# Altium PCB ROTARY_SW.PcbDoc
Units mil, origin at the board's own origin, x right, y up, seen from the top; angles counter-clockwise.
Board outline 675 x 750 mil, 2 copper layers (Top Layer, Bottom Layer); 8 components, 6 nets, 25 pads, 0 vias.
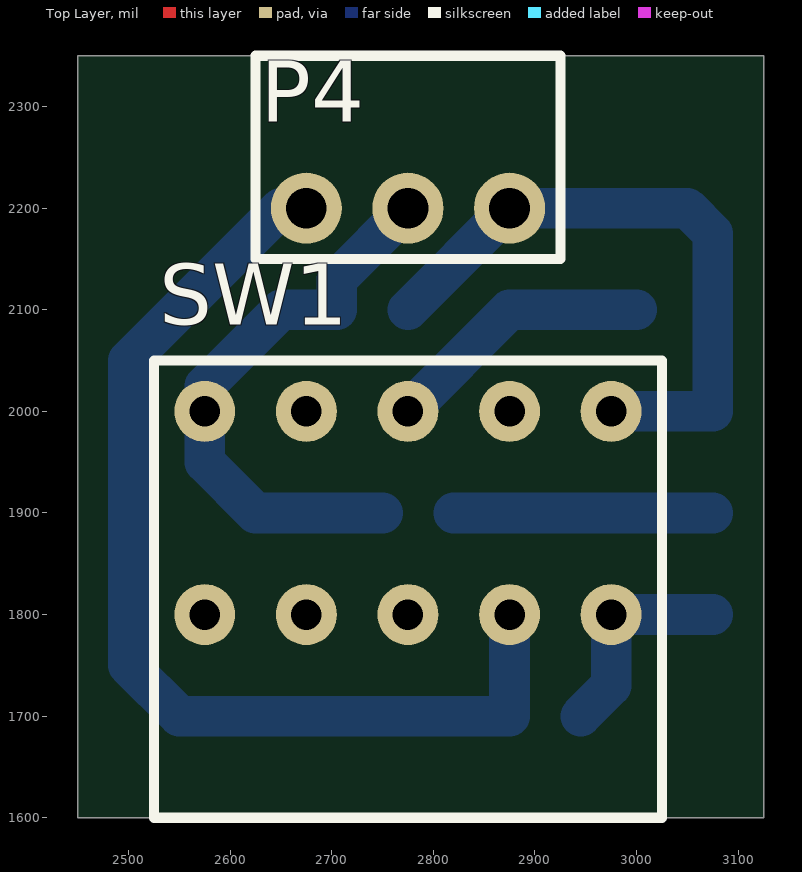
[diagram p0: Top Layer view]
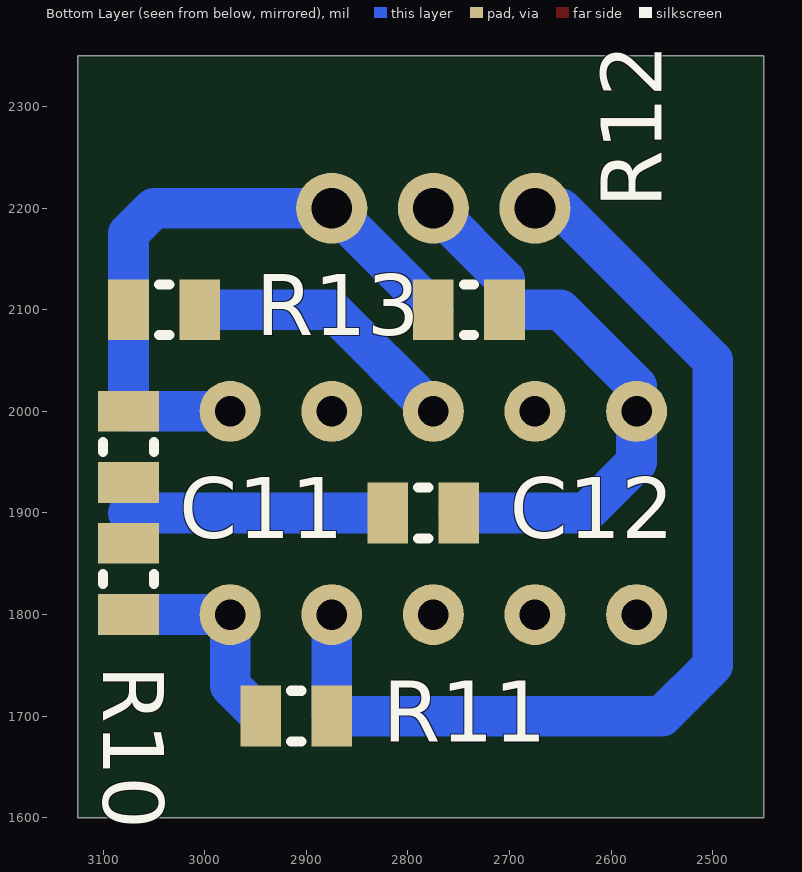
[diagram p1: Bottom Layer view, seen from below]
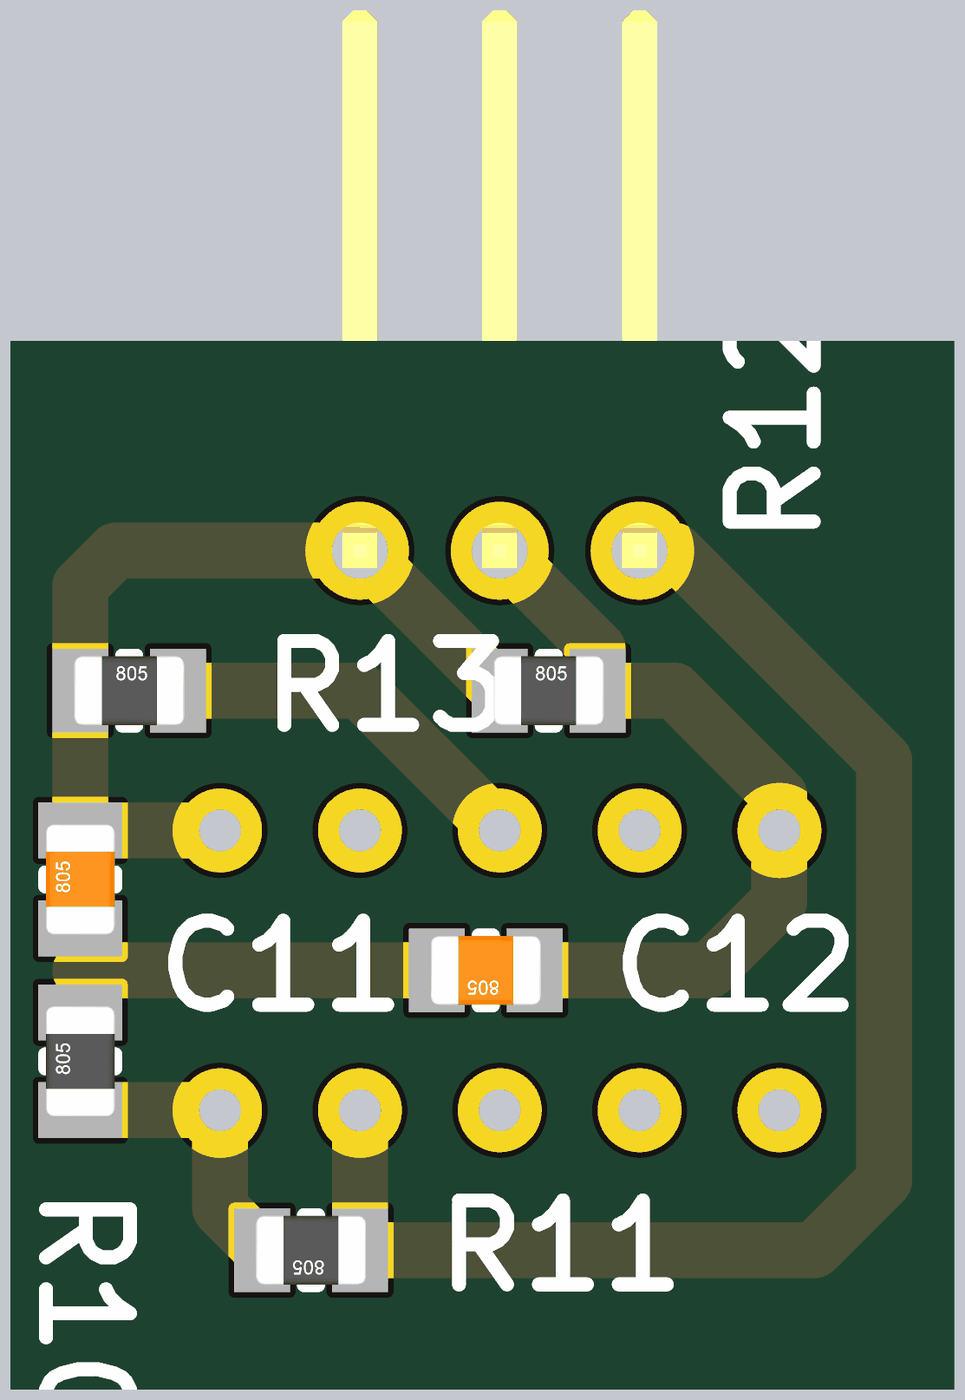
[diagram p2: 3D render of the assembled board from below, using the file's embedded part models]

## Layer stack, top to bottom
Top Solder: solder mask 0.4, Solder Resist, Dk 3.5
Top Layer: signal copper 1.4
Dielectric 1: dielectric 12.6, FR-4, Dk 4.8
Bottom Layer: signal copper 1.4
Bottom Solder: solder mask 0.4, Solder Resist, Dk 3.5

## Board outline
2450,1600 2450,2350 3125,2350 3125,1600

## Design rules (kind name [scope] priority, off if disabled: settings)
Clearance [All] p1: gap=10
PolygonConnect [All] p1: connectstyle=Relief reliefconductorwidth=10 reliefentries=4 polygonreliefangle="90 Angle" airgapwidth=10
RoomDefinition ROTARY_SW [InComponentClass('ROTARY_SW')] p1 off: confinementstyle=ConfineIn formatcopy=TRUE lockcomponents=FALSE outline 2450,1600 3125,1600 3125,2350 2450,2350
RoutingVias [All] p1: holewidth=28 width=50 viastyle="Through Hole" minholewidth=28 minwidth=50 maxholewidth=28 maxwidth=50
SilkToBoardRegionClearance [All] p1 off:
SolderMaskExpansion [All] p1: expansion=4
Width [All] p1: maxlimit=40 minlimit=40 preferedwidth=40
28 further rules are at their usual default settings.

## Components (designator, comment, footprint, x,y, rotation, side; value= is the part's Value field where it differs from the comment)
C11 "Capacitor" 0805_Capacitor 3075,2005 r180 bottom
C12 "Capacitor" 0805_Capacitor 2825,1900 r90 bottom
P4 "SIL-CONN-3" SIL-CONN-3-R1 2875,2200 r270 top
R10 "Resistor" 0805_Resistor 3075,1875 r180 bottom
R11 "Resistor" 0805_Resistor 2950,1700 r90 bottom
R12 "Resistor" 0805_Resistor 2700,2100 r270 bottom
R13 "Resistor" 0805_Resistor 3000,2100 r270 bottom
SW1 "SRBM131400" SRBM131400 2575,1800 r90 top

## Footprints (in the part's own frame and the unit in brackets; to place one, negate y for a bottom-side part, rotate by r counter-clockwise, add the part's x,y. Pads: shape width x height; smd on the part's side, far side on the other; paste and mask are expansions set on the pad)
0805_Capacitor [mil]
  rect 60x40 smd: 1(0,-5) 2(0,-75)
  silkscreen extent -25,-45 25,-35, body extent -25,-79 25,-1, height 31
0805_Resistor [mil]
  rect 60x40 smd: 1(0,-5) 2(0,-75)
  silkscreen extent -25,-45 25,-35, body extent -25,-79 25,-1, height 31
SIL-CONN-3-R1 [mil]
  round 70 hole 40: 1(0,0) 2(0,-100) 3(0,-200)
  silkscreen extent -150,-250 50,50, body extent -386,-250 13,50, height 99
SRBM131400 [mil]
  round 60 hole 30: 1(0,-400) 2(0,-300) 3(0,-200) 4(0,-100) 5(0,0) 6(200,-400) 7(200,-300) 8(200,-200) 9(200,-100) 10(200,0)
  silkscreen extent -200,-450 250,50, body extent -200,-450 250,50, height 433

## Nets (pads, with @x,y where several pads share a name; then routed paths per layer and width w, separated by ;. In a path a pad name is that pad's centre, name@x,y a point inside that pad or via, vN(x,y) a via of type N, cw(c..) or ccw(c..) an arc to the next point about the centre after c; other vN are vias at no path point)
GND: P4.3 R11.2 SW1.2 | length 1032.8
  Bottom Layer w40: P4.3 2650,2200 2500,2050 2500,1750 2550,1700 R11.2 SW1.2
NetC11_1: C11.1 P4.1 R12.2 R13.2 SW1.6 | length 626.8
  Bottom Layer w40: R12.2 P4.1 3050,2200 3075,2175 R13.2 C11.1 SW1.6
NetC11_2: C11.2 C12.1 R10.1 | length 255
  Bottom Layer w40: C12.1 3075,1900
NetC12_2: C12.2 P4.2 R12.1 SW1.10 | length 560.8
  Bottom Layer w40: C12.2 2625,1900 2575,1950 SW1.10 2575,2025 2650,2100 R12.1 2705,2130 P4.2
NetR10_2: R10.2 R11.1 SW1.1 | length 212.4
  Bottom Layer w40: R11.1 2975,1730 SW1.1 R10.2
NetR13_1: R13.1 SW1.8 | length 266.4
  Bottom Layer w40: SW1.8 2875,2100 R13.1@3000,2100
pads on no net: SW1.3 SW1.4 SW1.5 SW1.7 SW1.9

## Silkscreen, mask and mechanical layers (free items; w line width, h text height)
Mechanical 1:
  the board outline again, w10